# Altium PCB stm8.PcbDoc
Units mil, origin at the board's own origin, x right, y up, seen from the top; angles counter-clockwise.
Board outline 2100 x 3075 mil, 2 copper layers (Top Layer, Bottom Layer); 23 components, 44 nets, 143 pads, 65 vias.
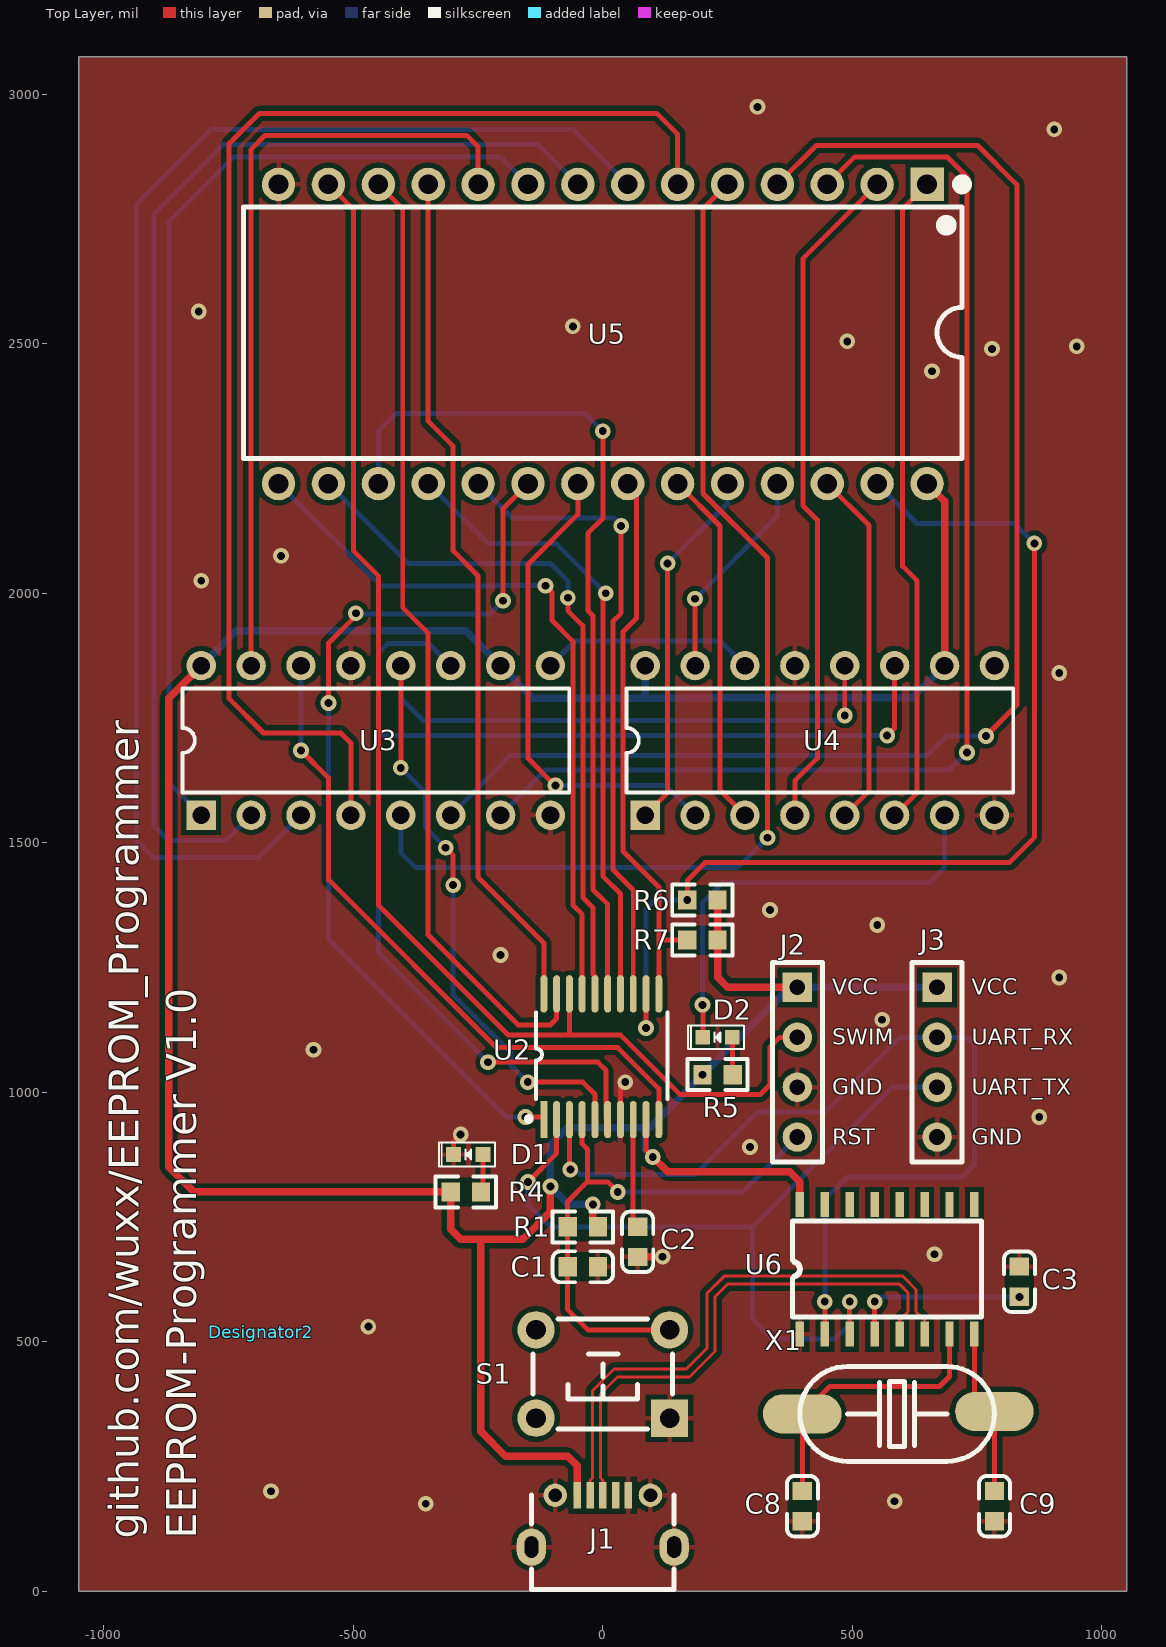
[diagram p0: Top Layer view]
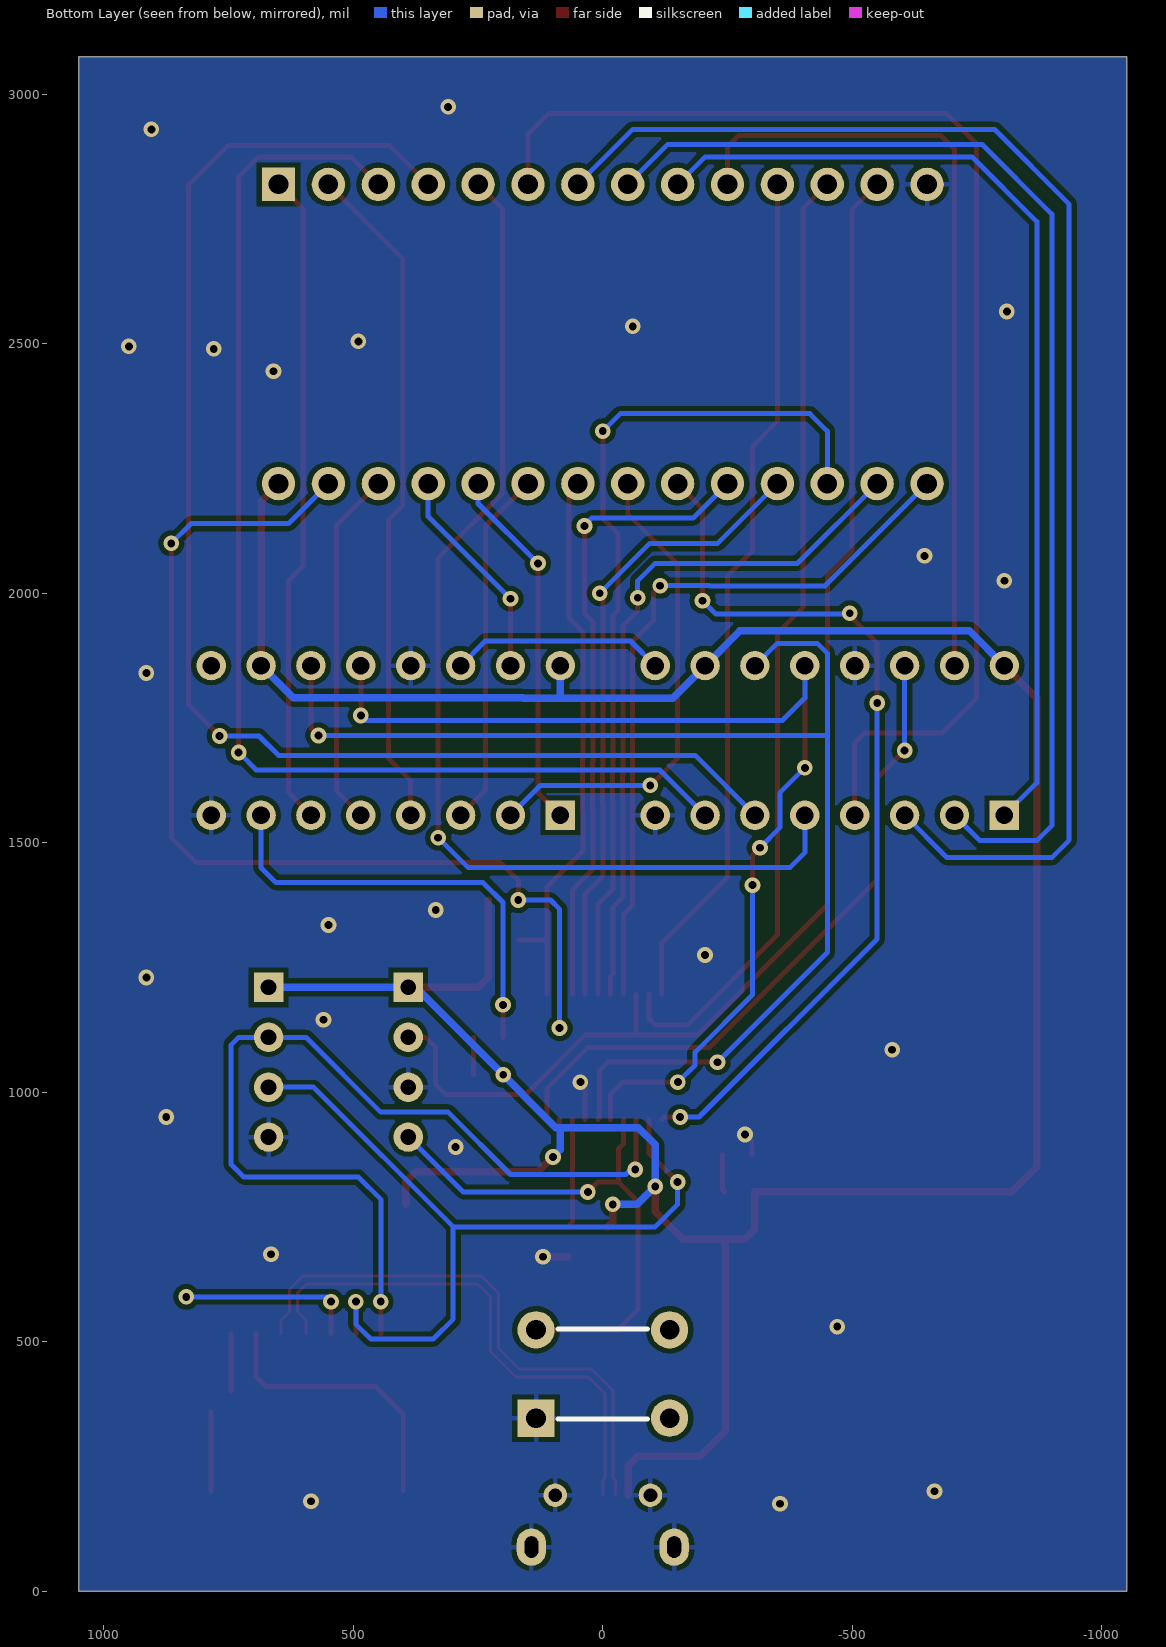
[diagram p1: Bottom Layer view, seen from below]
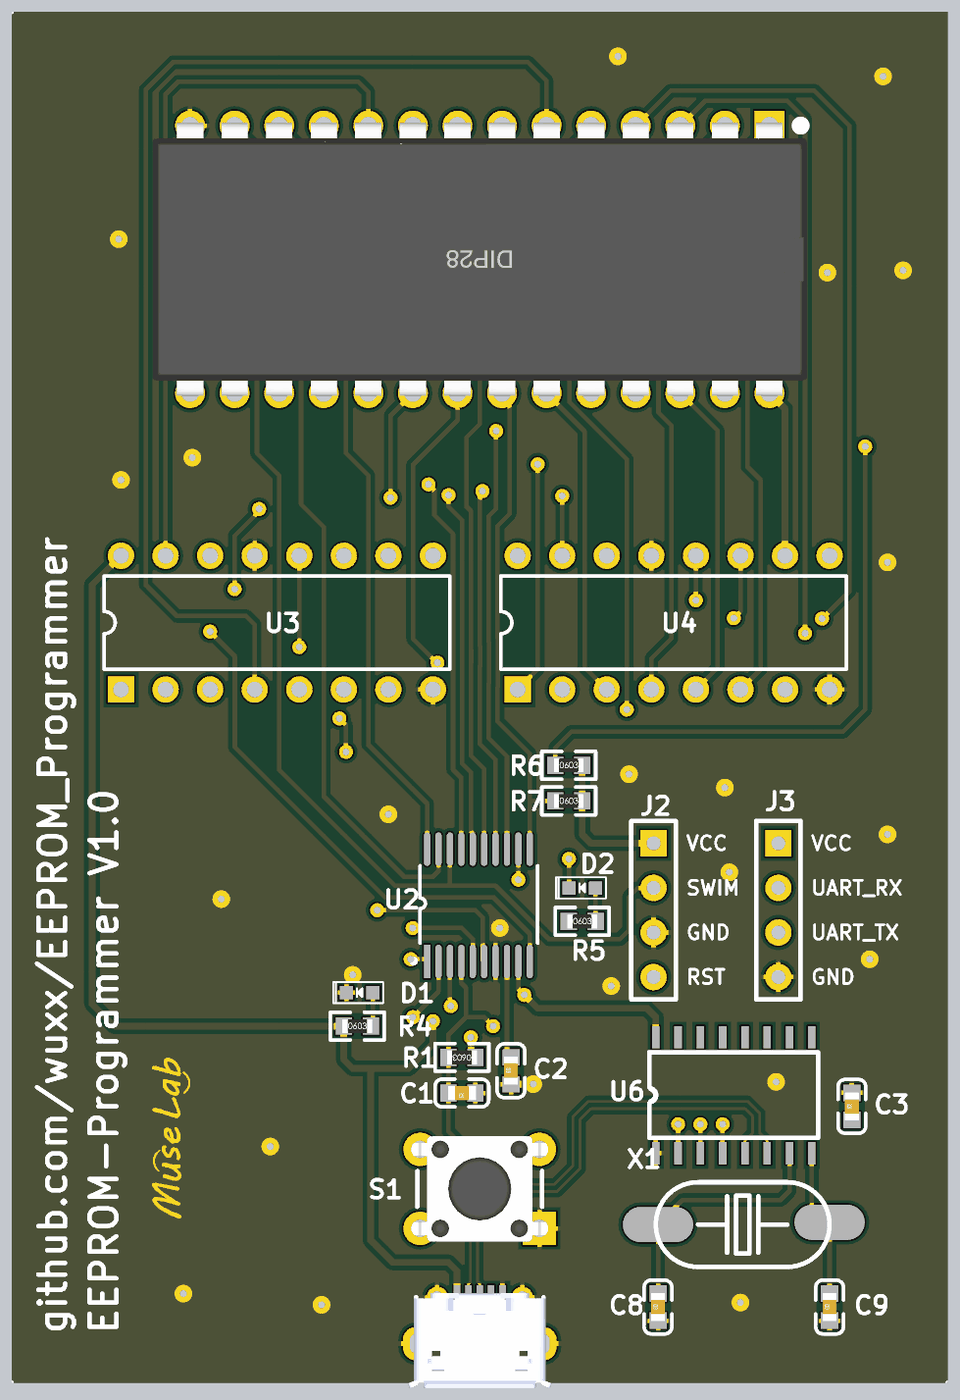
[diagram p2: 3D render of the assembled board from above, using the file's embedded part models]

## Layer stack, top to bottom
Top Solder: solder mask 0.4, Solder Resist, Dk 3.5
Top Layer: signal copper 1.4
Dielectric 1: dielectric 12.6, FR-4, Dk 4.8
Bottom Layer: signal copper 1.4
Bottom Solder: solder mask 0.4, Solder Resist, Dk 3.5

## Board outline
-1050,0 1050,0 1050,3075 -1050,3075

## Design rules (kind name [scope] priority, off if disabled: settings)
Clearance [All] p1: gap=10 ignorepadtopadclearanceinfootprint=FALSE except(0: Arc-Hole Track-Hole SMDPad-Hole THPad-Hole Via-Hole Fill-Hole Poly-Hole Region-Hole Text-Hole)
DiffPairsRouting [All] p1: maxlimit=10 minlimit=10 mostfreqgap=10 toplayer_minwidth=6 toplayer_maxwidth=15 toplayer_prefwidth=15 bottomlayer_minwidth=6 bottomlayer_maxwidth=15 bottomlayer_prefwidth=15 maxuncoupledlength=500
PolygonConnect [All] p1: thpad.connectstyle=Relief thpad.reliefconductorwidth=10 thpad.reliefentries=4 thpad.polygonreliefangle="90 Angle" thpad.airgapwidth=10 smdpad.connectstyle=Relief smdpad.reliefconductorwidth=10 smdpad.reliefentries=4 smdpad.polygonreliefangle="90 Angle" smdpad.airgapwidth=10 via.connectstyle=Direct via.reliefconductorwidth=10 via.reliefentries=4 via.polygonreliefangle="90 Angle" via.airgapwidth=10
RoutingVias [All] p1: holewidth=15.75 width=31.5 viastyle="Through Hole" minholewidth=15.75 minwidth=31.5 maxholewidth=15.75 maxwidth=31.5
SolderMaskExpansion [All] p1: expansion=4
Width [All] p1: maxlimit=100 minlimit=6 preferedwidth=10
29 further rules are at their usual default settings.

## Classes and differential pairs
differential pair USB: +USB_P -USB_N

## Components (designator, comment, footprint, x,y, rotation, side; value= is the part's Value field where it differs from the comment)
C1 "Cap" 0603_C -10,650 r180 top value=100nF
C2 "Cap" 0603_C 70,670 r90 top value=1uF
C3 "0.1uF" 0603_C 835,590 r90 top value=1uF
C8 "20pF" 0603_C 400,140 r90 top value=1uF
C9 "20pF" 0603_C 785,140 r90 top value=1uF
D1 "LED0" 0603_LED -269.69,875 r180 top
D2 "LED0" 0603_LED 230,1110 r180 top
Designator2 "Comment" LOGO -685,520 r90 top
J1 "Micro USB B" USB_MICRO_5S_B 0,140 r180 top
J2 "Header 4" HEADER_4x1 390,1210 r270 top
J3 "Header 4" HEADER_4x1 670,1210 r270 top
R1 "Res2" 0603_R -10,730 r180 top value=1K
R4 "Res2" 0603_R -304.69,800 r0 top value=1K
R5 "Res2" 0603_R 200,1035 r0 top value=1K
R6 "Res2" 0603_R 169.68,1385 r0 top value=4.7K
R7 "Res2" 0603_R 169.68,1305 r0 top value=4.7K
S1 "SW-PB" "TSW DIP-6*6*6" 0,435 r180 top
U2 "STM8S103F3P6" TSSOP20 -118.11,945 r90 top locked
U3 "SN74HC595N" N016 -455,1705 r0 top locked
U4 "SN74HC595N" N016 435,1705 r0 top locked
U5 "AT28C256" DIP28-600 0,2519.68 r270 top locked
U6 "CH340G" CH340G 395,515 r90 top locked
X1 "XTAL" 49SMD 590,355 r0 top value=12MHz

## Footprints (in the part's own frame and the unit in brackets; to place one, negate y for a bottom-side part, rotate by r counter-clockwise, add the part's x,y. Pads: shape width x height; smd on the part's side, far side on the other; paste and mask are expansions set on the pad)
49SMD [mm]
  oval 4x2 smd: 1(-4.826,0) 2(4.953,0.127)
  silkscreen extent -4.95,-2.41 4.95,2.41
0603_C [mm]
  rect 0.93x0.98 smd: 1(-0.008,0) 2(1.532,0)
  silkscreen extent -0.77,-0.79 2.3,0.79, body extent -0.04,-0.4 1.56,0.4, height 0.3
0603_LED [mm]
  rect 0.75x0.75 smd: 1(-0.75,0) 2(0.75,0)
  silkscreen extent -1.35,-0.6 1.5,0.6
0603_R [mm]
  rect 0.93x0.98 smd: 1(-0.008,0) 2(1.532,0)
  silkscreen extent -0.77,-0.79 2.3,0.79, body extent -0.09,-0.4 1.61,0.4, height 0.56
CH340G [mm]
  rect 1.27x0.43 smd: 1(0,0) 2(0,-1.27) 3(0,-2.54) 4(0,-3.81) 5(0,-5.08) 6(0,-6.35) 7(0,-7.62) 8(0,-8.89) 9(6.6,-8.89) 10(6.6,-7.62) 11(6.6,-6.35) 12(6.6,-5.08) 13(6.6,-3.81) 14(6.6,-2.54) 15(6.6,-1.27) 16(6.6,0)
  silkscreen extent 0.87,-9.25 5.75,0.38
DIP28-600 [mm] "37.3*15.3*4长宽高）"
  rect 1.7x1.7 hole 1: 1(-7.62,16.51)
  round 1.7 hole 1: 2(-7.62,13.97) 3(-7.62,11.43) 4(-7.62,8.89) 5(-7.62,6.35) 6(-7.62,3.81) 7(-7.62,1.27) 8(-7.62,-1.27) 9(-7.62,-3.81) 10(-7.62,-6.35) 11(-7.62,-8.89) 12(-7.62,-11.43) 13(-7.62,-13.97) 14(-7.62,-16.51) 15(7.62,-16.51) 16(7.62,-13.97) 17(7.62,-11.43) 18(7.62,-8.89) 19(7.62,-6.35) 20(7.62,-3.81) 21(7.62,-1.27) 22(7.62,1.27) 23(7.62,3.81) 24(7.62,6.35) 25(7.62,8.89) 26(7.62,11.43) 27(7.62,13.97) 28(7.62,16.51)
  silkscreen extent -7.87,-18.29 6.35,18.54, body extent -7.78,-18.65 7.78,18.65, height 4.7
HEADER_4x1 [mm]
  rect 1.5x1.5 hole 0.8: 1(0,0)
  round 1.5 hole 0.8: 2(2.54,0) 3(5.08,0) 4(7.62,0)
  silkscreen extent -1.27,-1.27 8.89,1.27
LOGO [mil]
N016 [mm] "DIP; 16 Leads; Row Spacing 7.62 mm; Pitch 2.54 mm"
  rect 1.5x1.5 hole 0.9: 1(-8.89,-3.81)
  round 1.5 hole 0.9: 2(-6.35,-3.81) 3(-3.81,-3.81) 4(-1.27,-3.81) 5(1.27,-3.81) 6(3.81,-3.81) 7(6.35,-3.81) 8(8.89,-3.81) 9(8.89,3.81) 10(6.35,3.81) 11(3.81,3.81) 12(1.27,3.81) 13(-1.27,3.81) 14(-3.81,3.81) 15(-6.35,3.81) 16(-8.89,3.81)
  silkscreen extent -9.85,-2.65 9.85,2.65
TSSOP20 [mm] "20-pin, 4.40 mm body, 0.65 mm pitch"
  rect 1.9x0.356 smd: 1(0,0)
  oval 1.9x0.356 smd: 2(0,-0.65) 3(0,-1.3) 4(0,-1.95) 5(0,-2.6) 6(0,-3.25) 7(0,-3.9) 8(0,-4.55) 9(0,-5.2) 10(0,-5.85) 11(6.4,-5.85) 12(6.4,-5.2) 13(6.4,-4.55) 14(6.4,-3.9) 15(6.4,-3.25) 16(6.4,-2.6) 17(6.4,-1.95) 18(6.4,-1.3) 19(6.4,-0.65) 20(6.4,0)
  silkscreen extent -0.1,-6.3 5.45,0.9
"TSW DIP-6*6*6" [mm] "6*6*6mm"
  rect 1.9x1.9 hole 1: 1(-3.4,2.25)
  round 1.9 hole 1: 2(-3.4,-2.25) 3(3.4,-2.25) 4(3.4,2.25)
  silkscreen extent -3.56,-2.79 3.56,2.79, body extent -4.11,-3 4.11,3, height 5.95
USB_MICRO_5S_B [mil]
  rect 15x54 smd: 1(51,-52) 2(25.5,-52) 3(0,-52) 4(-25.5,-52) 5(-51,-52)
  oval 59.06x74.8 hole 27.56 slot 43.31 at 90 deg: 6(-143,52) 7(143,52)
  round 47.24 hole 27.5: 8(95.5,-52) 9(-95.5,-52)
  silkscreen extent -143,-52 143,137, body extent -161,-61 161,152, height 105

## Part data
C1 C2: "Capacitor", LatestRevisionDate=17-Jul-2002, LatestRevisionNote="Re-released for DXP Platform.", PackageDescription="Radial Cap, Thru-Hole; 2 Leads; 0.3 in Pin Spacing", PackageReference=RAD-0.3, Published=8-Jun-2000, Publisher="Altium Limited"
C3 C8 C9: library part CAP, "Capacitor"
D1 D2: "Typical INFRARED GaAs LED", LatestRevisionDate=08-Jul-2005, LatestRevisionNote="Mech Layer 1 removed.", PackageDescription="LED; 2 Leads", PackageReference=LED-0, Published=8-Jun-2000, Publisher="Altium Limited"
J2 J3: "Header, 4-Pin", LatestRevisionDate=17-Jul-2002, LatestRevisionNote="Re-released for DXP Platform.", Publisher="Altium Limited"
R1 R4 R5 R6 R7: "Resistor", LatestRevisionDate=17-Jul-2002, LatestRevisionNote="Re-released for DXP Platform.", PackageDescription="Axial Device, Thru-Hole; 2 Leads; 0.4 in Pin Spacing", PackageReference=AXIAL-0.4, Published=8-Jun-2000, Publisher="Altium Limited"
S1: "Switch", LatestRevisionDate=17-Jul-2002, LatestRevisionNote="Re-released for DXP Platform.", PackageDescription="Switch; 2 Leads", PackageReference=SPST-2, Published=24-Mar-1999, Publisher="Altium Limited"
U2: "ST 8-bit  Microcontroller"
U3 U4: "8-Bit Shift Register with 3-State Output Registers", Code_JEDEC=MS-001-BB, ComponentLink1Description="Manufacturer Link", ComponentLink1URL=http://www.ti.com/, ComponentLink2Description=Datasheet, ComponentLink2URL=http://www-s.ti.com/sc/ds/sn74hc595.pdf, DatasheetVersion=May-1997, LatestRevisionDate=04-Mar-2005, LatestRevisionNote="Stylized 3D Model Added.", PackageDescription="DIP; 16 Leads; Row Spacing 7.62 mm; Pitch 2.54 mm", PackageReference=N016, PackageVersion=Oct-1995, Published=8-Jun-2000, Publisher="Altium Limited"
U5: "EEPROM 32Kx8 256k bit   The AT28C256 is a high-performance Electrically Erasable and Programmable Read Only Memory. Its 256K of memory is organized as 32,768 words by 8 bits."

## Via types
v1: diameter 31.5, hole 15.75, Top Layer to Bottom Layer, 65 vias

## Nets (pads, with @x,y where several pads share a name; then routed paths per layer and width w, separated by ;. In a path a pad name is that pad's centre, name@x,y a point inside that pad or via, vN(x,y) a via of type N, cw(c..) or ccw(c..) an arc to the next point about the centre after c; other vN are vias at no path point)
5V: J1.1 J2.1 J3.1 R1.1 R4.1 R5.1 R6.2 R7.2 U2.9 U3.10 U3.16 U4.10 U4.16 U5.28 U6.16 | length 6697.6
  Top Layer w10: U2.9 86.61,883.39 v1(100,870) ; R5.1@199.69,1030.31 v1(199.69,1035)
  Top Layer w15: U3.16 -870,1790 -870,850 -820,800 R4.1 -305,725 -285,705 -245,705 ; v1(-105,811) -105,760 -160,705 -245,705 ; J1.1 -51,251 -70,270 -195,270 -245,320 -245,705 ; v1(-20,775) -20,740.31 R1.1 ; v1(100,870) 130,840 375,840 395,820 U6.16 ; R6.2 R7.2 230,1230 250,1210 J2.1 ; U5.28 685,2184.69 U4.10
  Bottom Layer w10: J2.1@374.69,1210 J2.1
  Bottom Layer w15: U3.16 -735,1925 -275,1925 U3.10 -140,1790 85,1790 ; v1(-20,775) -69,775 v1(-105,811) -105,895 -71,929 85,929 ; U4.16 85,1790 ; v1(100,870) 85,885 85,929 ; v1(199.69,1035) J2.1@374.69,1210 ; 226,1061 94,929 85,929 ; J2.1 J3.1 ; U4.10 620.47,1790.47 160,1790.47 159.53,1790 85,1790
A15: D2.2 U4.7 | length 889.2
  Top Layer w10: v1(200,1175) 200.47,1174.53 D2.2
  Bottom Layer w10: v1(200,1175) 200.12,1175.12 200.12,1380.12 240,1420 655,1420 685,1450 U4.7
GND: C1.1 C2.1 C3.2 C8.1 C9.1 D1.2 J1.5 J1.6 J1.7 J1.8 J1.9 J2.3 J3.4 S1.1 U2.7 U3.8 U3.13 U4.8 U4.13 U5.14 U6.1 | length 175
  Top Layer w10: D1.2 -299.21,900.79 v1(-285,915) ; U2.7 35.43,1010.43 v1(45,1020)
  Top Layer w15: C2.1 119.69,669.69 v1(120,670)
  other v1: -355,175 585,180 -665,200 -470,530 665,675 295,890 875,950 -580,1085 560,1145 915,1230 -205,1275 550,1335 335,1365 915,1840 -805,2025 -645,2075 660,2445 780,2490 950,2495 490,2505 -60,2535 -810,2565 905,2930 310,2975
NetC2_2: C2.2 U2.8 | length 218.4
  Top Layer w10: U2.8 61.02,739.29 C2.2
NetC3_1: C3.1 U6.4 | length 359
  Top Layer w10: U6.4 v1(545,580)
  Bottom Layer w10: v1(545,580) 554.69,589.68 v1(835,589.68)
NetC8_2: C8.2 U6.7 X1.1 | length 565.8
  Top Layer w10: C8.2 X1.1 455,410 675,410 695,430 U6.7
NetC9_2: C9.2 U6.8 X1.2 | length 274.7
  Top Layer w10: 745,400 U6.8 ; C9.2 X1.2
NetD1_1: D1.1 R4.2 | length 76.7
  Top Layer w10: R4.2 -240.16,804.21 D1.1
NetD2_1: D2.1 R5.2 | length 75.3
  Top Layer w10: D2.1 259.53,1035.79 R5.2
NetU3_1: U3.1 U5.9 | length 2013.7
  Bottom Layer w10: U3.1 -870,1620 -870,2745 -740,2875 -205.31,2875 U5.9
NetU3_2: U3.2 U5.8 | length 2395.8
  Bottom Layer w10: U3.2 -756,1504 -870,1504 -900,1534 -900,2760 -760,2900 -130.31,2900 U5.8
NetU3_3: U3.3 U5.7 | length 2747.5
  Bottom Layer w10: U3.3 -690,1470 -900,1470 -935,1505 -935,2780 -785,2930 -60.31,2930 U5.7
NetU3_4: U3.4 U5.6 | length 2580.3
  Top Layer w10: U3.4 -505,1700 -525,1720 -680,1720 -749.53,1789.53 -749.53,2900.47 -688,2962 108,2962 150,2920 U5.6
NetU3_5: U3.5 U5.5 | length 2230.7
  Top Layer w10: U5.5 201,2770.69 201,2200 330,2071 v1(330,1510)
  Bottom Layer w10: U3.5 -405,1480 -375,1450 270,1450 v1(330,1510)
NetU3_6: U3.6 U5.4 | length 2814.7
  Top Layer w10: U5.4 428.31,2898 751,2898 830,2819 830,1776 v1(768,1714)
  Bottom Layer w10: U3.6 -185,1675 650,1675 689,1714 v1(768,1714)
NetU3_7: U3.7 U5.3 | length 2460.7
  Top Layer w10: U5.3 505.31,2875 690,2875 730,2835 v1(730,1681)
  Bottom Layer w10: U3.7 -114.25,1645.75 694.75,1645.75 v1(730,1681)
NetU3_9: U3.9 U4.14 | length 430.9
  Bottom Layer w10: U3.9 -55.68,1904.32 235.68,1904.32 U4.14
NetU3_15: U3.15 U5.10 | length 1586.4
  Top Layer w10: U3.15 -705,2890 -677,2918 -273,2918 -250,2895 U5.10
NetU4_1: U4.1 U5.24 | length 733
  Top Layer w10: U4.1 130,1600 v1(130,2060)
  Bottom Layer w10: v1(130,2060) 250,2180 U5.24
NetU4_2: U4.2 U5.21 | length 974.3
  Top Layer w10: v1(-95,1615) -96,1615 -150,1669 -150,2058.29 -50,2158.29 U5.21
  Bottom Layer w10: v1(-95,1615) 125,1615 U4.2
NetU4_3: U4.3 U5.23 | length 720.6
  Top Layer w10: U5.23 235,2134.69 235,1605 U4.3
NetU4_4: U4.4 U5.2 | length 1357.1
  Top Layer w10: U4.4 385,1624 430,1669 430,2147 401,2176 401,2670.69 U5.2
NetU4_5: U4.5 U5.26 | length 719.8
  Top Layer w10: U5.26 534,2135.69 534,1604 U4.5
NetU4_6: U4.6 U5.1 | length 1315.6
  Top Layer w10: U4.6 630,1600 630,2025 601,2054 601,2770.69 U5.1
NetU4_15: U4.15 U5.25 | length 433
  Top Layer w10: U4.15 v1(185,1989)
  Bottom Layer w10: v1(185,1989) 350,2154 U5.25
NRST: C1.2 J2.4 R1.2 S1.2 U2.4 | length 1097.5
  Top Layer w10: U2.4 -41.34,896.34 -31.02,886.02 -31.02,820.23 ; v1(30,800) 9.77,820.23 -31.02,820.23 ; S1.2 -30,523.58 -70.31,563.9 C1.2 -70.31,689 R1.2 -70.32,780.94 -31.02,820.23
  Bottom Layer w10: v1(30,800) 280,800 J2.4
PA1: U2.5 U3.12 U4.12 | length 2213.7
  Top Layer w10: v1(-405,1650) U3.12 ; v1(-315,1490) -300,1475 v1(-300,1415) ; v1(-150.48,1020) -40,1020 -15.75,995.75 U2.5 ; v1(485,1755) U4.12
  Bottom Layer w10: v1(-405,1650) -355,1600 -355,1530 v1(-315,1490) ; U3.12 -405,1790 -360,1745 475,1745 v1(485,1755) ; v1(-300,1415) -300,1195 -185,1080 -185,1054.52 v1(-150.48,1020)
PA2: U2.6 U3.11 U4.11 | length 2613
  Top Layer w10: v1(-230,1060) -10,1060 6.25,1043.75 6.25,948.59 U2.6 ; v1(570,1715) 585,1730 U4.11 U4.11@570,1840
  Bottom Layer w10: -450,1715 v1(570,1715) ; U3.11 -349.53,1899.53 -430,1899.53 -450,1879.53 -450,1280 v1(-230,1060)
PA3: U2.10 U3.14 | length 1349.5
  Top Layer w10: v1(-605,1685) -549.53,1629.53 -549.53,1425.53 -213,1089 30.2,1089 112.2,1007 U2.10
  Bottom Layer w10: v1(-605,1685) U3.14
PB4: R6.1 U2.12 U5.27 | length 2122.2
  Top Layer w10: v1(86.62,1128.38) U2.12 ; v1(169.37,1385) 169.37,1424.37 205,1460 815,1460 865,1510 v1(865,2100)
  Bottom Layer w10: v1(86.62,1128.38) 86.62,1366.62 105,1385 v1(169.37,1385) ; U5.27 629.69,2140 825,2140 v1(865,2100)
PB5: R7.1 U2.11 U5.22 | length 1129
  Top Layer w10: U5.22 67.5,2202.19 67.5,1949.75 40,1922.25 40,1669.91 40.75,1669.16 40.75,1591.02 40.47,1590.74 40.47,1560.57 40,1560.09 40,1483.26 112.21,1411.05 112.21,1330 U2.11 ; 112.21,1305 R7.1
PC3: U2.13 U5.19 | length 1285.1
  Top Layer w10: v1(36.75,2135) 36.75,1960.17 20,1943.43 20,1661.62 20.75,1660.87 20.75,1599.3 20.47,1599.02 20.47,1568.85 20,1568.38 20,1446.28 61.03,1405.25 U2.13
  Bottom Layer w10: U5.19 -181.31,2151 22,2151 36.75,2136.25 v1(36.75,2135)
PC4: U2.14 U5.18 | length 1267.8
  Top Layer w10: v1(6,2000) 0,1994 0,1653.34 0.75,1652.59 0.75,1607.58 0.47,1607.31 0.47,1577.14 0,1576.66 0,1433 35.43,1397.57 U2.14
  Bottom Layer w10: U5.18 -230.31,2100 -94,2100 v1(6,2000)
PC5: U2.15 U5.17 | length 1741.9
  Top Layer w10: v1(0,2325) 0,2150 -30,2120 -30,1965.31 -20,1955.31 -20,1645.05 -19.25,1644.3 -19.25,1615.87 -19.53,1615.59 -19.53,1585.42 -20,1584.95 -20,1406.28 9.84,1376.44 U2.15
  Bottom Layer w10: U5.17 -450,2325 -415,2360 -35,2360 v1(0,2325)
PC6: U2.16 U5.16 | length 1411.8
  Top Layer w10: v1(-70,1991) -70,1965 -40,1935 -40,1636.77 -39.25,1636.02 -39.25,1624.15 -39.53,1623.88 -39.53,1593.7 -40,1593.23 -40,1390 -20.08,1370.08 -20.08,1236.86 -15.75,1232.53 U2.16
  Bottom Layer w10: U5.16 -390.31,2060 -105,2060 -70,2025 v1(-70,1991)
PC7: U2.17 U5.15 | length 1469.3
  Top Layer w10: v1(-115,2015) -101.75,2001.75 -101.75,1945.75 -60,1904 -60,1628.48 -59.53,1628.01 -59.53,1601.99 -60,1601.52 -60,1375 -41.34,1356.34 U2.17
  Bottom Layer w10: U5.15 -445.31,2015 -213.48,2015 -212.74,2015.75 -115.75,2015.75 v1(-115,2015)
PD1: J2.2 U2.18 U5.13 | length 2657
  Top Layer w10: U5.13 -500,2769.69 -500,2085 -450,2035 -450,1375 -190,1115 -66.93,1115 ; U2.18 -66.93,1115 ; J2.2 355,1110 335,1090 335,1015 315,995 155,995 35,1115 -66.93,1115
PD2: U2.19 U5.12 | length 1932.8
  Top Layer w10: U5.12 -401,2770.69 -401,1971 -350,1920 -350,1315 -170,1135 -105,1135 -92.52,1147.48 U2.19
PD3: U2.20 U5.11 | length 1718.8
  Top Layer w10: U5.11 -350,2345 -300,2295 -300,2085 -250,2035 -250,1430.89 -118.11,1299 U2.20
PD4: U2.1 U5.20 | length 1819.1
  Top Layer w10: v1(-550,1780) -550,1900 -495,1955 v1(-495,1960) ; v1(-200,1985) -200,2169.69 U5.20 ; v1(-155,950) -123.11,950 U2.1
  Bottom Layer w10: v1(-550,1780) -550,1307 -193,950 v1(-155,950) ; v1@-495,1958.25 -226.75,1958.25 v1(-200,1985)
PD5: J3.3 U2.2 U6.3 | length 1667.4
  Top Layer w10: v1(-150,820) -92.52,877.48 U2.2 ; U6.3 v1(495,580)
  Bottom Layer w10: v1(-150,820) -150,775 -105,730 300,730 ; v1(495,580) 495,535 465,505 340,505 300,545 300,730 ; J3.3 580,1010 300,730
PD6: J3.2 U2.3 U6.2 | length 1874.1
  Top Layer w10: U2.3 -66.93,846.93 v1(-65,845) ; U6.2 v1(445,580)
  Bottom Layer w10: v1(-65,845) -56,845 -46,835 185,835 310,960 445,960 595,1110 J3.2 730,1110 745,1095 745,855 720,830 490,830 445,785 v1(445,580)
USB_N: J1.2 U6.6 | length 1127.4
  Top Layer w6: J1.2 -25.5,222 -20.75,226.75 -20.75,401.63 22.62,445 167.37,445 209,486.63 209,596.63 243.37,631 601.63,631 628,604.63 628,560 645,543 U6.6
USB_P: J1.3 U6.5 | length 1074.4
  Top Layer w6: J1.3 0,222 -4.75,226.75 -4.75,395 29.25,429 174,429 225,480 225,590 250,615 595,615 612,598 612,560 595,543 U6.5
pads on no net: J1.4 S1.3 S1.4 U4.9 U6.9 U6.10 U6.11 U6.12 U6.13 U6.14 U6.15

## Polygon pours and split planes (outlines as drawn)
GND on Top Layer "GND_L01_P000" (solid, remove dead copper, pour order 0): -1050,3075 1050,3075 1050,0 -1050,0
GND on Bottom Layer "GND_L02_P002" (solid, remove dead copper, pour order 2): -1050,3075 1050,3075 1050,0 -1050,0

## Silkscreen, mask and mechanical layers (free items; w line width, h text height)
Top Overlay:
  text "VCC" at 460,1195 h32
  text "VCC" at 740,1195 h32
  text "SWIM" at 460,1095 h32
  text "UART_RX" at 740,1095 h32
  text "GND" at 460,995 h32
  text "UART_TX" at 740,995 h32
  text "RST" at 460,895 h32
  text "GND" at 740,895 h32
  text "github.com/wuxx/EEPROM_Programmer" at -930,105 h60 r90
  text "EEPROM-Programmer V1.0" at -815,105 h60 r90
Mechanical 1:
  the board outline again, w6

## Dimensions
-1050,0 to 1050,0 on Top Overlay
-1050,3075 to -1050,0 on Top Overlay